# Altium PCB PCB1.PcbDoc
Units mm, origin at the board's own origin, x right, y up, seen from the top; angles counter-clockwise.
Board outline 152.4 x 101.6 mm, 2 copper layers (Top Layer, Bottom Layer); 144 components, 73 nets, 398 pads, 0 vias.
Unrouted connection lines stored in the file: 292.
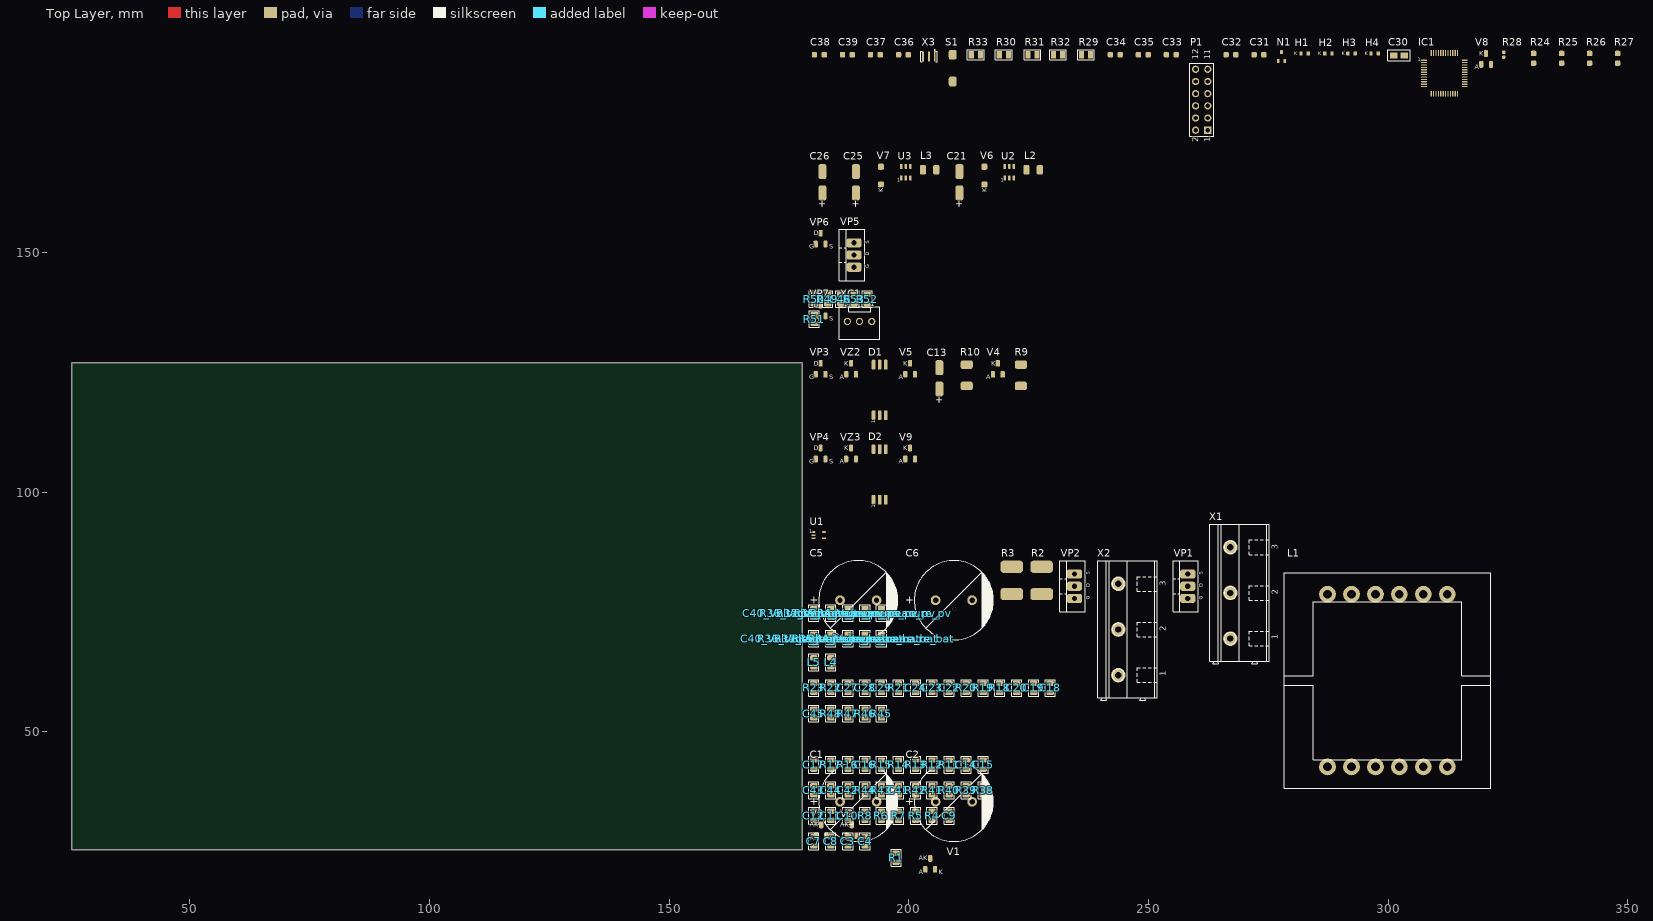
[diagram p0: Top Layer view]
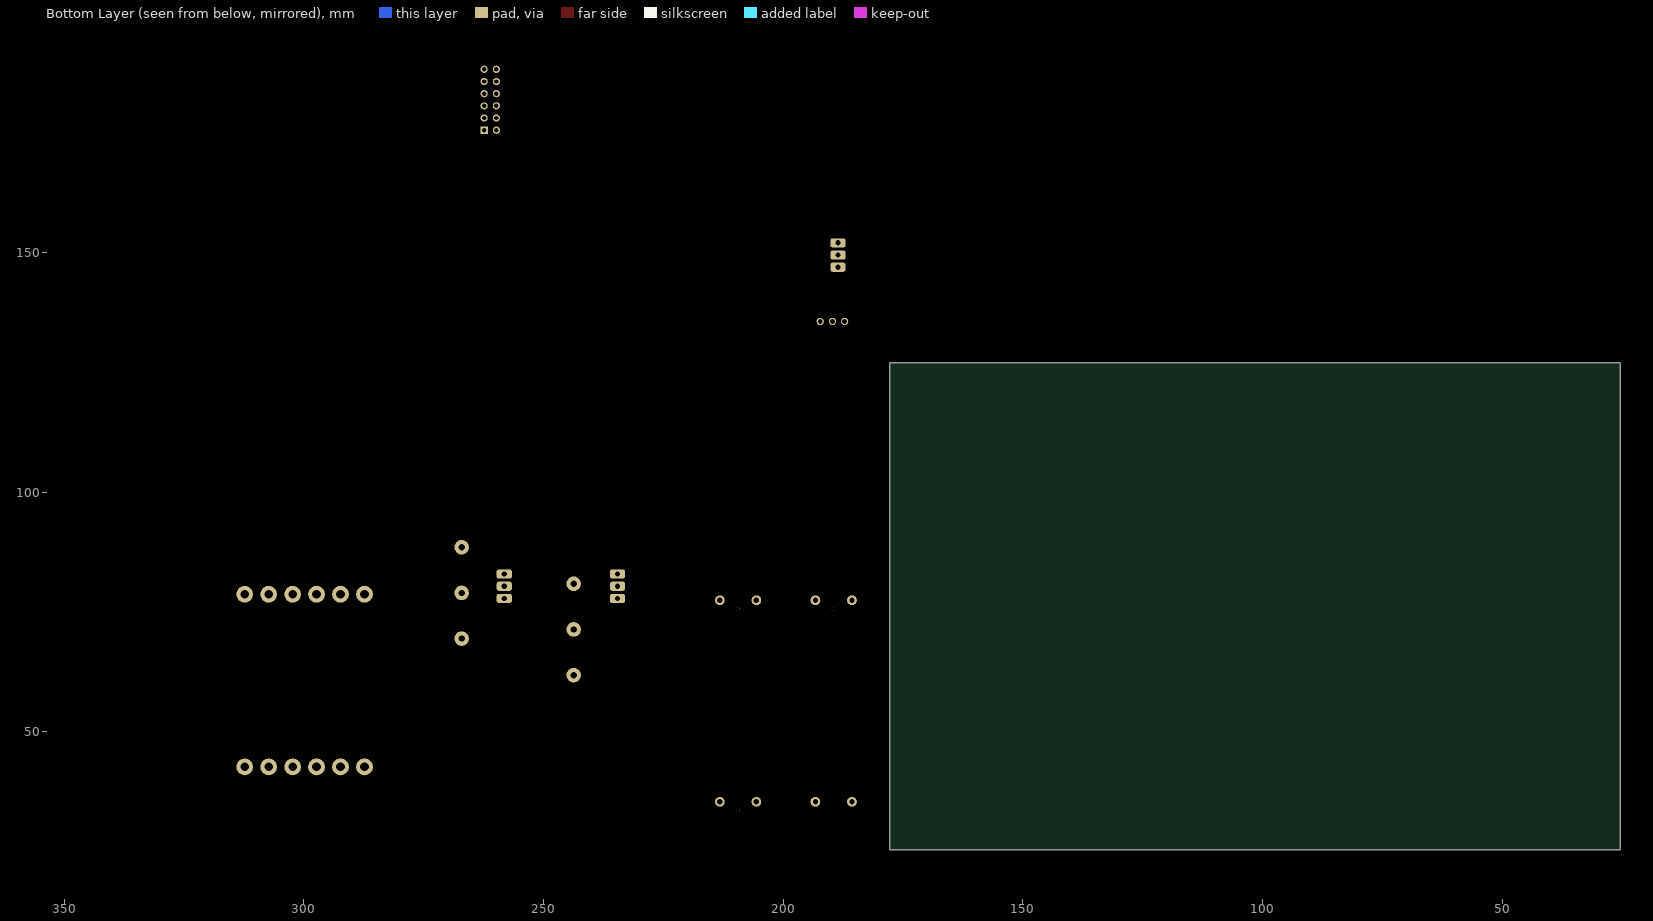
[diagram p1: Bottom Layer view, seen from below]

## Layer stack, top to bottom
Top Layer: signal copper 0.0356
Dielectric: dielectric 0.32, FR-4, Dk 4.8
Bottom Layer: signal copper 0.0356

## Board outline
25.4,25.4 177.8,25.4 177.8,127 25.4,127

## Design rules (kind name [scope] priority, off if disabled: settings)
Clearance [All] p1: gap=0.254
PolygonConnect [All] p1: connectstyle=Relief reliefconductorwidth=0.254 reliefentries=4 polygonreliefangle="90 Angle"
RoomDefinition FAN [InComponentClass('FAN')] p1: confinementstyle=ConfineIn formatcopy=TRUE lockcomponents=FALSE outline 178.943,131.699 194.183,131.699 194.183,142.621 178.943,142.621
RoutingVias [All] p1: holewidth=0.711 width=1.27 viastyle="Through Hole" minholewidth=0.711 minwidth=1.27 maxholewidth=0.711 maxwidth=1.27
SilkscreenOverComponentPads SilkToSolderMaskClearance [IsPad] p1: minsilkscreentomaskgap=0.254
SolderMaskExpansion [All] p1: expansion=0.102
Width [All] p1: maxlimit=0.254 minlimit=0.254 preferedwidth=0.254
27 further rules are at their usual default settings.

## Classes and differential pairs
channel class Voltage_measure: Voltage_measure_bat Voltage_measure_pv
component class Voltage_measure_pv: C40_Voltage_measure_pv R34_Voltage_measure_pv R35_Voltage_measure_pv R36_Voltage_measure_pv R37_Voltage_measure_pv
component class Voltage_measure_bat: C40_Voltage_measure_bat R34_Voltage_measure_bat R35_Voltage_measure_bat R36_Voltage_measure_bat R37_Voltage_measure_bat
component class uC: C30 C31 C32 C33 C34 C35 C36 C37 C38 C39 H1 H2 H3 H4 IC1 L4 L5 N1 P1 R24 R25 R26 R27 R28 R29 R30 R31 R32 R33 S1 V8 X3
component class Converter: C1 C2 C3 C4 C5 C6 C7 C8 L1 R1 R2 R3 VP1 VP2 X1 X2
component class Buck_converter: V1 V2 V3
component class Current_measure_bat: C9 C10 C11 C12 R4 R5 R6 R7 R8 U1
component class Driver_rect: C41 C42 C43 C44 D2 R38 R39 R40 R41 R42 R43 R44 V9 VP4 VZ3
component class Driver_SW: C13 C14 C15 C16 C17 D1 R9 R10 R11 R12 R13 R14 R15 R16 R17 V4 V5 VP3 VZ1 VZ2
component class FAN: C46 R49 R50 R51 R52 R53 V10 VP7 XC1
component class Output: C45 R45 R46 R47 R48 VP5 VP6
component class SMPS: C18 C19 C20 C21 C22 C23 C24 C25 C26 C27 C28 C29 L2 L3 R18 R19 R20 R21 R22 R23 U2 U3 V6 V7

## Components (designator, comment, footprint, x,y, rotation, side; value= is the part's Value field where it differs from the comment)
C1 "10190340" "CR 1.1 7.62 16.5" 185.674,35.433 r0 top
C2 "10190340" "CR 1.1 7.62 16.5" 205.613,35.433 r0 top
C3 "10192075" C0805_R_V0 187.325,27.178 r90 top
C4 "11736520" C0805_R_V0 190.881,27.178 r90 top
C5 "10190340" "CR 1.1 7.62 16.5" 185.674,77.47 r0 top
C6 "10190340" "CR 1.1 7.62 16.5" 205.613,77.47 r0 top
C7 "10192075" C0805_R_V0 180.213,27.178 r90 top
C8 "11736520" C0805_R_V0 183.769,27.178 r90 top
C9 "10192075" C0805_R_V0 208.407,32.512 r90 top
C10 "10192075" C0805_R_V0 187.325,32.512 r90 top
C11 "10192075" C0805_R_V0 183.769,32.512 r90 top
C12 "10192075" C0805_R_V0 180.213,32.512 r90 top
C13 "11690909" "CAP UUD CR 5X5.8" 206.375,121.539 r90 top
C14 "11736520" C0805_R_V0 211.963,43.18 r90 top
C15 "10192075" C0805_R_V0 215.519,43.18 r90 top
C16 "10192075" C0805_R_V0 190.881,43.18 r90 top
C17 "10192075" C0805_R_V0 180.213,43.18 r90 top
C18 "11736520" C0805_R_V0 229.489,59.182 r90 top
C19 "10192075" C0805_R_V0 226.06,59.182 r90 top
C20 "11736520" C0805_R_V0 222.504,59.182 r90 top
C21 "11690909" "CAP UUD CR 5X5.8" 210.566,162.433 r90 top
C22 "11736520" C0805_R_V0 208.407,59.182 r90 top
C23 "10192075" C0805_R_V0 204.851,59.182 r90 top
C24 "11736520" C0805_R_V0 201.422,59.182 r90 top
C25 "11690909" "CAP UUD CR 5X5.8" 188.976,162.433 r90 top
C26 "11690909" "CAP UUD CR 5X5.8" 181.991,162.433 r90 top
C27 "11736520" C0805_R_V0 187.325,59.182 r90 top
C28 "10192075" C0805_R_V0 190.881,59.182 r90 top
C29 "10192075" C0805_R_V0 194.31,59.182 r90 top
C30 "2u2F 6.8V 10%" 0805_R_V0 302.26,191.135 r0 top
C31 "11736520" C0805A 272.034,191.262 r0 top
C32 "2u2F 6.8V 10%" C0805A 266.192,191.262 r0 top
C33 "1uF 50V 10%" C0805A 253.746,191.262 r0 top
C34 "1uF 50V 10%" C0805A 242.062,191.262 r0 top
C35 "100nF 6.8V 10%" C0805A 247.904,191.262 r0 top
C36 "10nF 6.8V 10%" C0805A 197.866,191.262 r0 top
C37 "2u2F 6.8V 10%" C0805A 192.024,191.262 r0 top
C38 "36pF 50V" C0805A 180.34,191.262 r0 top
C39 "36pF 50V" C0805A 186.182,191.262 r0 top
C40_Voltage_measure_bat "10192075" C0805_R_V0 180.213,69.469 r90 top (schematic designator C40)
C40_Voltage_measure_pv "10192075" C0805_R_V0 180.213,74.803 r90 top (schematic designator C40)
C41 "10192075" C0805_R_V0 197.866,37.846 r90 top
C42 "10192075" C0805_R_V0 187.325,37.846 r90 top
C43 "11736520" C0805_R_V0 180.213,37.846 r90 top
C44 "10192075" C0805_R_V0 183.769,37.846 r90 top
C45 "10192075" C0805_R_V0 180.213,53.848 r90 top
C46 "10192075" C0805_R_V0 185.838,140.288 r90 top
D1 "12544475" "SO-6 (11.5 MM)" 192.659,116.078 r90 top
D2 "12544475" "SO-6 (11.5 MM)" 192.659,98.425 r90 top
H1 "12133537" "LED 0603_12133537(Primary)" 281.813,191.516 r0 top
H2 "12133535" "LED 0603_12133535(Primary)" 286.766,191.516 r0 top
H3 "12133535" "LED 0603_12133535(Primary)" 291.592,191.516 r0 top
H4 "12133535" "LED 0603_12133535(Primary)" 296.418,191.516 r0 top
IC1 "TMS320F28027_PT" LQFP48 307.467,190.119 r0 top
L1 "INDUTOR 100uH EE42" "INDUTOR EE42_V1" 299.847,60.706 r90 top
L2 "12924787" L1210 224.536,167.259 r0 top
L3 "12924787" L1210 202.946,167.259 r0 top
L4 "Inductor" R0805_R_V0 183.769,64.516 r90 top
L5 "Inductor" R0805_R_V0 180.213,64.516 r90 top
N1 "10050567" SC70A 277.749,190.881 r0 top
P1 "Header 6X2" HDR2X6 262.382,175.514 r90 top
R1 "10118077" R0805_R_V0 197.358,23.749 r90 top
R2 "11372881" WSL2816A 227.711,78.74 r90 top
R3 "11372881" WSL2816A 221.488,78.74 r90 top
R4 "10118077" R0805_R_V0 204.851,32.512 r90 top
R5 "10118077" R0805_R_V0 201.422,32.512 r90 top
R6 "10118077" R0805_R_V0 194.31,32.512 r90 top
R7 "10118077" R0805_R_V0 197.866,32.512 r90 top
R8 "10118077" R0805_R_V0 190.881,32.512 r90 top
R9 "10191999" R2010A 223.393,122.174 r90 top
R10 "10191999" R2010A 212.09,122.174 r90 top
R11 "10118077" R0805_R_V0 208.407,43.18 r90 top
R12 "10118077" R0805_R_V0 204.851,43.18 r90 top
R13 "10118077" R0805_R_V0 201.422,43.18 r90 top
R14 "10118077" R0805_R_V0 197.866,43.18 r90 top
R15 "10118077" R0805_R_V0 194.31,43.18 r90 top
R16 "10118077" R0805_R_V0 187.325,43.18 r90 top
R17 "10118077" R0805_R_V0 183.769,43.18 r90 top
R18 "10191981" R0805_R_V0 218.948,59.182 r90 top
R19 "10191981" R0805_R_V0 215.519,59.182 r90 top
R20 "10191981" R0805_R_V0 211.963,59.182 r90 top
R21 "10191981" R0805_R_V0 197.866,59.182 r90 top
R22 "10191981" R0805_R_V0 183.769,59.182 r90 top
R23 "10191981" R0805_R_V0 180.213,59.182 r90 top
R24 "10191962" R0805A 330.327,189.484 r90 top
R25 "10191962" R0805A 336.169,189.484 r90 top
R26 "10191962" R0805A 342.011,189.484 r90 top
R27 "10191962" R0805A 347.853,189.484 r90 top
R28 "11417855" R0402 324.104,191.262 r90 top
R29 "1k 5% 0805" 0805_SH_R_V1 236.982,191.262 r0 top
R30 "1k 5% 0805" 0805_SH_R_V1 219.837,191.262 r0 top
R31 "1k 5% 0805" 0805_SH_R_V1 225.806,191.262 r0 top
R32 "1k 5% 0805" 0805_SH_R_V1 231.14,191.262 r0 top
R33 "1M 1% 0805" 0805_SH_R_V1 213.995,191.262 r0 top
R34_Voltage_measure_bat "10118077" R0805_R_V0 194.31,69.469 r90 top (schematic designator R34)
R34_Voltage_measure_pv "10118077" R0805_R_V0 194.31,74.803 r90 top (schematic designator R34)
R35_Voltage_measure_bat "10118077" R0805_R_V0 190.881,69.469 r90 top (schematic designator R35)
R35_Voltage_measure_pv "10118077" R0805_R_V0 190.881,74.803 r90 top (schematic designator R35)
R36_Voltage_measure_bat "10118077" R0805_R_V0 183.769,69.469 r90 top (schematic designator R36)
R36_Voltage_measure_pv "10118077" R0805_R_V0 183.769,74.803 r90 top (schematic designator R36)
R37_Voltage_measure_bat "10118077" R0805_R_V0 187.325,69.469 r90 top (schematic designator R37)
R37_Voltage_measure_pv "10118077" R0805_R_V0 187.325,74.803 r90 top (schematic designator R37)
R38 "10118077" R0805_R_V0 215.519,37.846 r90 top
R39 "10118077" R0805_R_V0 211.963,37.846 r90 top
R40 "10118077" R0805_R_V0 208.407,37.846 r90 top
R41 "10118077" R0805_R_V0 204.851,37.846 r90 top
R42 "10118077" R0805_R_V0 201.422,37.846 r90 top
R43 "10118077" R0805_R_V0 194.31,37.846 r90 top
R44 "10118077" R0805_R_V0 190.881,37.846 r90 top
R45 "10118077" R0805_R_V0 194.31,53.848 r90 top
R46 "10118077" R0805_R_V0 190.881,53.848 r90 top
R47 "10118077" R0805_R_V0 187.325,53.848 r90 top
R48 "10118077" R0805_R_V0 183.769,53.848 r90 top
R49 "10118077" R0805_R_V0 183.08,140.288 r90 top
R50 "10118077" R0805_R_V0 180.322,140.288 r90 top
R51 "10118077" R0805_R_V0 180.322,136.13 r90 top
R52 "10118077" R0805_R_V0 191.354,140.288 r90 top
R53 "10118077" R0805_R_V0 188.596,140.288 r90 top
S1 "10050610" "TECLA STSM BOURNS" 209.169,188.468 r90 top
U1 "OPA348AIDCKR" "DCK R-PDSO-G5" 181.229,91.059 r0 top
U2 "12576507" SOT23-6 220.98,166.751 r0 top
U3 "12576507" SOT23-6 199.39,166.751 r0 top
V1 "DIODO BAS40" SOT23-BAV99A 204.47,22.479 r0 top
V2 "DIODO BAS40" SOT23-BAV99A 188.087,29.464 r0 top
V3 "DIODO BAS40" SOT23-BAV99A 181.737,29.464 r0 top
V4 "10261302" SOT23A 218.567,125.73 r0 top
V5 "10261302" SOT23A 200.279,125.73 r0 top
V6 "10192125" SOD123A 215.773,164.211 r90 top
V7 "10192125" SOD123A 194.183,164.211 r90 top
V8 "10192124" SOT23A 320.421,190.373 r0 top
V9 "10261302" SOT23A 200.279,108.077 r0 top
VP1 "10190449" "TO-220AB (Primary)" 258.191,77.851 r90 top
VP2 "10190449" "TO-220AB (Primary)" 234.569,77.851 r90 top
VP3 "11110327" MOS_SOT23A 181.61,125.73 r0 top
VP4 "11110327" MOS_SOT23A 181.61,108.077 r0 top
VP5 "10190449" "TO-220AB (Primary)" 188.595,146.939 r90 top
VP6 "11110327" MOS_SOT23A 181.61,152.908 r0 top
VP7 "11110327" MOS_SOT23A 181.61,137.922 r0 top
VZ2 "10050447" ZEN_SOT23A 187.96,125.73 r0 top
VZ3 "10050447" ZEN_SOT23A 187.96,108.077 r0 top
X1 "10233722" 662-A-111/03-SM 267.081,69.469 r90 top
X2 "10233722" 662-A-111/03-SM 243.713,61.849 r90 top
X3 "XTAL 60MHz" "XTAL  CSTCE_G_A" 204.216,190.881 r0 top
XC1 "10190697" "MOLEX 3P 180G M" 192.278,135.636 r0 top

## Footprints (in the part's own frame and the unit in brackets; to place one, negate y for a bottom-side part, rotate by r counter-clockwise, add the part's x,y. Pads: shape width x height; smd on the part's side, far side on the other; paste and mask are expansions set on the pad)
662-A-111/03-SM [mil]
  round 120 hole 51.18: 1(0,0) 2(375,0) 3(750,0)
  silkscreen extent -208,-320 938,170, body extent -218,-311 939,181, height 847
0805_R_V0 [mm]
  rect 1.524x1.27 smd: 1(-1.1,0) 2(1.1,0)
  silkscreen extent -2.36,-1.13 2.37,1.13
0805_SH_R_V1 [mm] "IPC"
  rect 1.1x1.55 smd: 1(0.95,0) 2(-0.95,0)
  silkscreen extent -1.75,-1.05 1.75,1.05, body extent -1.02,-0.63 0.98,0.62, height 0.78
C0805_R_V0 [mm] "IPC"
  rrect50% 1.1x1.55 smd: 1(0.95,0) 2(-0.95,0)
  silkscreen extent -1.75,-1.05 1.75,1.05, body extent -1,-0.62 1,0.63, height 0.78
C0805A [mil]
  rrect50% 45x45 smd: 1(0,0) 2(80,0)
  body extent 1,-25 79,25, height 31
"CAP UUD CR 5X5.8" [mm]
  rrect50% 3.1x1.651 smd: 1(0,0) 2(4.445,0)
  body extent -0.46,-2.65 5.04,2.65, height 6
"CR 1.1 7.62 16.5" [mil]
  round 27.6 hole 30 unplated: 0(152,-72)
  round 80 hole 43.31: 1(0,0) 2(300,0)
  silkscreen extent -175,-325 475,325, body extent -174,-324 475,324, height 1030
"DCK R-PDSO-G5" [mm] "SOT23, 5-Leads, Body 2x1.25mm, Pitch 0.65mm"
  rrect50% 0.762x0.338 smd: 1(-1.1,0.65) 2(-1.1,0) 3(-1.1,-0.65) 4(1.1,-0.65) 5(1.1,0.65)
  body extent -1.15,-1.05 1.15,1.05, height 1
HDR2X6 [mm] "Connector; Header; 6x2 Position"
  rect 1.5x1.5 hole 0.9: 1(0,0)
  round 1.5 hole 0.9: 2(0,2.54) 3(2.54,0) 4(2.54,2.54) 5(5.08,0) 6(5.08,2.54) 7(7.62,0) 8(7.62,2.54) 9(10.16,0) 10(10.16,2.54) 11(12.7,0) 12(12.7,2.54)
  silkscreen extent -1.27,-1.27 13.97,3.81
"INDUTOR EE42_V1" [mm]
  round 3.5 hole 1.8: 1(-18,-12.5) 1(-18,-7.5) 1(-18,-2.5) 1(-18,2.5) 1(-18,7.5) 1(-18,12.5) 2(18,-12.5) 2(18,-7.5) 2(18,-2.5) 2(18,2.5) 2(18,7.5) 2(18,12.5)
  silkscreen extent -22.5,-21.5 22.5,21.5, body extent -22.5,-21.5 22.5,21.5, height 35
L1210 [mil] "Indutor SMD"
  rrect50% 50x80 smd: 1(0,0) 2(110,0)
  body extent -8,-50 118,48, height 98
"LED 0603_12133535(Primary)" [mil]
  rrect50% 28x35 smd: A(60,0) K(0,0)
  body extent -3,-18 63,18, height 35
"LED 0603_12133537(Primary)" [mil]
  rrect50% 28x35 smd: A(60,0) K(0,0)
  body extent -2,-18 64,18, height 35
LQFP48 [mil]
  rrect50% 48x10 smd: 1(0.15,-0.2) 2(0.15,-19.89) 3(0.15,-39.57) 4(0.15,-59.26) 5(0.15,-78.94) 6(0.15,-98.63) 7(0.15,-118.31) 8(0.15,-138) 9(0.15,-157.69) 10(0.15,-177.37) 11(0.15,-197.06) 12(0.15,-216.74) 25(335.3,-216.74) 26(335.3,-197.06) 27(335.3,-177.37) 28(335.3,-157.69) 29(335.3,-138) 30(335.3,-118.31) 31(335.3,-98.63) 32(335.3,-78.94) 33(335.3,-59.26) 34(335.3,-39.57) 35(335.3,-19.89) 36(335.3,-0.2)
  rrect50% 10x48 smd: 13(59.2,-275.8) 14(78.89,-275.8) 15(98.57,-275.8) 16(118.26,-275.8) 17(137.94,-275.8) 18(157.63,-275.8) 19(177.32,-275.8) 20(197,-275.8) 21(216.68,-275.8) 22(236.37,-275.8) 23(256.06,-275.8) 24(275.74,-275.8) 37(275.74,58.85) 38(256.06,58.85) 39(236.37,58.85) 40(216.68,58.85) 41(197,58.85) 42(177.32,58.85) 43(157.63,58.85) 44(137.94,58.85) 45(118.26,58.85) 46(98.57,58.85) 47(78.89,58.85) 48(59.2,58.85)
  body extent -10,-286 345,69, height 63
"MOLEX 3P 180G M" [mil]
  round 59.5 hole 39.37: 1(0,0) 2(-100,0) 3(-200,0)
  silkscreen extent -265,-145 65,120, body extent -263,-118 63,118, height 453
MOS_SOT23A [mil]
  rrect50% 35x55 smd: D(0,45) G(-40,-45) S(40,-45)
  body extent -57,-55 57,55, height 51
R0402 [mil]
  rrect50% 27x25 smd: 1(-20,0) 2(20,0)
  body extent -20,-10 20,10, height 20
R0805_R_V0 [mm] "IPC"
  rrect50% 1.1x1.55 smd: 1(0.95,0) 2(-0.95,0)
  silkscreen extent -1.75,-1.05 1.75,1.05, body extent -1.02,-0.63 0.98,0.62, height 0.78
R0805A [mil]
  rrect50% 45x45 smd: 1(0,0) 2(80,0)
  body extent 1,-25 79,25, height 31
R2010A [mil]
  rrect50% 70x100 smd: 1(0,0) 2(175,0)
  body extent -11,-50 186,50, height 22
SC70A [mil]
  rrect50% 20.98x34 smd: GND(-26,-36) VCC(0,36) ~RESET(26,-36)
  body extent -44,-44 44,44, height 44
"SO-6 (11.5 MM)" [mil]
  rrect50% 80x30 smd: 1(0,0) 2(0,-50) 3(0,-100) 4(415,-100) 5(415,-50) 6(415,0)
  body extent -19,-140 433,40, height 130
SOD123A [mil]
  rrect50% 50x50 smd: A(145,0) K(0,0)
  body extent -3,-34 149,33, height 57
SOT23-6 [mil]
  rrect50% 20x40 smd: 1(-37.5,-47.5) 2(0,-47.5) 3(37.5,-47.5) 4(37.5,47.5) 5(0,47.5) 6(-37.5,47.5)
  body extent -57,-55 57,55, height 57
SOT23-BAV99A [mil]
  rrect50% 35x55 smd: A(-40,-45) AK(0,45) K(40,-45)
  body extent -57,-55 57,55, height 51
SOT23A [mil]
  rrect50% 35x55 smd: A(-40,-45) K(0,45) NC(40,-45)
  body extent -57,-55 57,55, height 51
"TECLA STSM BOURNS" [mil]
  rrect50% 80x65 smd: 1(-110,0) 2(110,0)
  body extent -140,-69 144,69, height 169
"TO-220AB (Primary)" [mm]
  rrect50% 1.905x3.175 hole 1.1: D(2.54,0) G(0,0) S(5.08,0)
  silkscreen extent -2.79,-2.21 7.87,3.05, body extent -2.8,-2.18 7.88,2.65, height 19.89
WSL2816A [mm]
  rrect50% 2.54x4.7 smd: 1(0,0) 2(5.715,0)
  body extent -0.82,-2.22 6.53,2.23, height 0.91
"XTAL  CSTCE_G_A" [mm]
  rect 0.4x2.1 smd: 0(0,0) 1(1.2,0) 2(-1.2,0)
  silkscreen extent -1.7,-1.1 1.7,1.4, body extent -1.6,-0.6 1.6,0.7, height 0.7
ZEN_SOT23A [mil]
  rrect50% 35x55 smd: A(-40,-45) K(0,45) NC(40,-45)
  body extent -57,-55 57,55, height 51

## Part data
C1 C2 C5 C6: "CAP ELE 1000uF 50V"
C3 C7 C9 C10 C11 C12 C15 C16 C17 C19 C23 C28 C29 C40_Voltage_measure_bat C40_Voltage_measure_pv C41 C42 C44 C45 C46: "CER SMD 100nF 50V"
C4 C8 C14 C18 C20 C22 C24 C27 C31 C43: "CER SMD X7R 1uF 50V 10%"
C13 C21 C25 C26: "CAP. ELET. SMD 22uF 35V"
C30 C32 C33 C34 C35 C36 C37: library part 11736520, "CER SMD X7R 1uF 50V 10%"
C38 C39: library part 11736520, "CER SMD C0G 36pF 50V"
D1 D2: "CI SMD ACPL-W343"
H1: "LED SMD VM (0603)"
H2 H3 H4: "LED SMD VD (0603)"
IC1: "LQFP48"
L1: library part 12578205, "INDUTOR 560uH 4A PCV-2"
L2 L3: "INDUTOR SMD 47uH 390mA"
N1: "CI SMD ADM803TAKSZ"
P1: "Header, 6-Pin, Dual row"
R1 R4 R5 R6 R7 R8 R11 R12 R13 R14 R15 R16 R17 R34_Voltage_measure_bat R34_Voltage_measure_pv R35_Voltage_measure_bat R35_Voltage_measure_pv R36_Voltage_measure_bat R36_Voltage_measure_pv R37_Voltage_measure_bat R37_Voltage_measure_pv R38 R39 R40 R41 R42 R43 R44 R45 R46 R47 R48 R49 R50 R51 R52 R53: "RFM SMD 1K 1% 0.1W"
R2 R3: "RFM SMD 0R015 1% 2W"
R9 R10: "RFM SMD 1K 1% 0.5W"
R18 R19 R20 R21 R22 R23: "RFM SMD 150R 1% 0.1W"
R24 R25 R26 R27: "RFM SMD 330R 5% 0.1W"
R28: "RES SMD 4K7 5% 0,063W"
R29 R30 R31 R32 R33: library part Res3_2, "Resistor"
S1: "Tecla SMD STSM-31-STR"
U1: "1 MHz, 45 uA, RRIO, Single Operational Amplifier, 2.1 to 5.5 V, -40 to 125 degC, 5-pin SOT23 (DCK5), Green (RoHS & no Sb/Br)"
U2 U3: "CI SMD LM2842"
V1 V2 V3 V8: "DIODO SMD BAS40"
V4 V5 V9: "DIODO SMD BAS16"
V6 V7: "Diodo SMD MBR0540 (SCHOTTKY)"
VP1 VP2 VP5: "MOSFET IRFB31N20D"
VP3 VP4 VP6 VP7: "MOSFET SMD BSH111"
VZ2 VZ3: "Zener  SMD BZX84C18"
X1 X2: "CON. EK950V-03P"
X3: library part XTAL, "Crystal Oscillator"
XC1: "CON MOLEX 3P 180G"

## Nets (pads, with @x,y where several pads share a name; then routed paths per layer and width w, separated by ;. In a path a pad name is that pad's centre, name@x,y a point inside that pad or via, vN(x,y) a via of type N, cw(c..) or ccw(c..) an arc to the next point about the centre after c; other vN are vias at no path point)
3V3: C12.2 C23.2 C24.2 C25.1 C34.1 C35.1 L3.2 L4.1 L5.2 N1.VCC P1.12 R12.1 R22.2 R23.2 R24.2 R25.2 R26.2 R27.2 R28.2 R29.2 R30.2 R31.2 R39.1 R49.2 U1.5 V1.K V2.K V3.K V8.K
15V: C19.2 C20.2 C21.1 C43.2 C44.2 D2.6 L2.2 R19.2 R20.2 XC1.1
\R\E\S\E\T\: C31.1 C36.1 IC1.3 N1.~RESET R28.1 R29.1 S1.2 V8.A
BAT+: C1.1 C2.1 C3.1 C4.1 C26.1 C27.2 C28.2 C29.2 L1.2 R1.1 R34_Voltage_measure_bat.2 U2.4 U2.5 U3.4 U3.5 X1.3
FAN_PWR: IC1.38 R52.1
FAN_SPEED: R51.2
GATE_RECT: C41.2 R40.2 R42.2 V9.A VP2.G VZ3.K
GATE_SW: C16.2 R13.2 R15.2 V5.A VP1.G VZ2.K
GND: C1.2 C2.2 C3.2 C4.2 C10.1 C11.1 C12.1 C17.1 C19.1 C20.1 C21.2 C23.1 C24.1 C25.2 C26.2 C27.1 C28.1 C29.1 C30.2 C31.2 C32.2 C33.2 C34.2 C35.2 C36.2 C37.1 C38.1 C39.2 C40_Voltage_measure_bat.1 C40_Voltage_measure_pv.1 C41.1 C42.1 C43.1 C44.1 C45.1 C46.1 D2.4 IC1.12 IC1.33 IC1.34 IC1.44 N1.GND P1.2 P1.10 R1.2 R2.2 R3.2 R17.1 R18.2 R21.2 R32.2 R36_Voltage_measure_bat.1 R36_Voltage_measure_pv.1 R37_Voltage_measure_bat.1 R37_Voltage_measure_pv.1 R42.1 R44.1 R45.2 R48.1 R53.1 S1.1 U1.1 U1.2 U2.2 U3.2 V1.A V2.A V3.A V6.A V7.A VP3.S VP4.S VP5.S VP6.S VP7.S VZ3.A X2.1 X2.3
GPIO34: IC1.19 P1.1 R30.1
HOT_SPOT: C13.2 C14.2 C15.1 C16.1 D1.4 L1.1 R15.1 VP1.S VP2.D VZ2.A
IO: C10.2 IC1.9 R8.2 V3.AK
LED_BAT: H3.K IC1.26
LED_FAULT: H1.K IC1.29
LED_OUT: H4.K IC1.25
LED_PV: H2.K IC1.27
NetC9_1: C9.1 R4.1 R5.1 R7.2 U1.3
NetC9_2: C9.2 R4.2 R5.2 R8.1 U1.4
NetC11_2: C11.2 R6.2 R7.1
NetC17_2: C17.2 R16.2 R17.2 VP3.G
NetC18_1: C18.1 U2.1
NetC18_2: C18.2 L2.1 U2.6 V6.K
NetC22_1: C22.1 U3.1
NetC22_2: C22.2 L3.1 U3.6 V7.K
NetC38_2: C38.2 IC1.45 R33.1 X3.1
NetC39_1: C39.1 IC1.46 R33.2 X3.2
NetC42_2: C42.2 R43.2 R44.2 VP4.G
NetC45_2: C45.2 R47.2 R48.2 VP6.G
NetC46_2: C46.2 R52.2 R53.2 VP7.G
NetD1_1: D1.1 R12.2
NetD1_3: D1.3 R14.2
NetD1_5: D1.5 R11.1 R13.1
NetD2_1: D2.1 R39.2
NetD2_3: D2.3 R41.2
NetD2_5: D2.5 R38.1 R40.1
NetH1_A: H1.A R24.1
NetH2_A: H2.A R25.1
NetH3_A: H3.A R26.1
NetH4_A: H4.A R27.1
NetR9_2: R9.2 R10.2 V4.A
NetR11_2: R11.2 V5.K
NetR14_1: R14.1 VP3.D
NetR18_1: R18.1 R19.1 R20.1 U2.3
NetR21_1: R21.1 R22.1 R23.1 U3.3
NetR34_Voltage_measure_bat_1: R34_Voltage_measure_bat.1 R35_Voltage_measure_bat.2 R36_Voltage_measure_bat.2 R37_Voltage_measure_bat.2
NetR34_Voltage_measure_pv_1: R34_Voltage_measure_pv.1 R35_Voltage_measure_pv.2 R36_Voltage_measure_pv.2 R37_Voltage_measure_pv.2
NetR38_2: R38.2 V9.K
NetR41_1: R41.1 VP4.D
NetR45_1: R45.1 R46.2 VP5.G
NetR46_1: R46.1 VP6.D
NetR49_1: R49.1 R51.1 XC1.3
NetR50_1: R50.1 VP7.D
NetR50_2: R50.2 XC1.2
OUTPUT: VP5.D X2.2
PV_+: C5.1 C6.1 C7.1 C8.1 R9.1 R10.1 R34_Voltage_measure_pv.2 VP1.D X1.1
PV_-: C5.2 C6.2 C7.2 C8.2 R2.1 R3.1 R6.1 VP2.S X1.2
PWM1B: IC1.28 R16.1
PWM2A: IC1.37 R43.1
PWM3A: IC1.39 R47.1
SCI_RX: IC1.48 P1.4
SCI_TX: IC1.1 P1.6
TCK: P1.3
TDI: IC1.20 P1.5
TDO: IC1.22 P1.9 R31.1
TMS: IC1.21 P1.7
TRST: IC1.2 P1.11 R32.1
VBAT: C40_Voltage_measure_pv.2 IC1.5 R35_Voltage_measure_pv.1 V1.AK
VCC_SW: C13.1 C14.1 C15.2 D1.6 V4.K
VDD: C33.1 IC1.35 L4.2
VDD1: C32.1 IC1.32
VDD2: C37.2 IC1.43
VDDA: C30.1 IC1.11 L5.1
VIN_PV: C40_Voltage_measure_bat.2 IC1.7 R35_Voltage_measure_bat.1 V2.AK
pads on no net: C1.0 C2.0 C5.0 C6.0 D1.2 D2.2 IC1.4 IC1.6 IC1.8 IC1.10 IC1.13 IC1.14 IC1.15 IC1.16 IC1.17 IC1.18 IC1.23 IC1.24 IC1.30 IC1.31 IC1.36 IC1.40 IC1.41 IC1.42 IC1.47 P1.8 V4.NC V5.NC V8.NC V9.NC VZ2.NC VZ3.NC X3.0

## Text inside footprints (layer, text, board x,y; h text height)
C1: Top Overlay "+" at 179.375,34.722 h1.59
C2: Top Overlay "+" at 199.314,34.722 h1.59
C5: Top Overlay "+" at 179.375,76.759 h1.59
C6: Top Overlay "+" at 199.314,76.759 h1.59
C13: Top Overlay "+" at 207.01,118.3 h1.52 r90
C21: Top Overlay "+" at 211.201,159.195 h1.52 r90
C25: Top Overlay "+" at 189.611,159.195 h1.52 r90
C26: Top Overlay "+" at 182.626,159.195 h1.52 r90
D1: Top Overlay "1" at 192.964,114.427 h0.79 r90
D2: Top Overlay "1" at 192.964,96.774 h0.79 r90
H1: Top Overlay "K" at 280.441,191.11 h0.79
H2: Top Overlay "K" at 285.445,191.11 h0.79
H3: Top Overlay "K" at 290.271,191.11 h0.79
H4: Top Overlay "K" at 295.097,191.11 h0.79
IC1: Top Overlay "1" at 306.133,189.865 h0.79
P1: Top Overlay "12" at 260.35,190.246 h1.27 r90; Top Overlay "1" at 262.89,191.262 h1.27 r90; Top Overlay "1" at 262.89,190.246 h1.27 r90; Top Overlay "1" at 262.89,172.974 h1.27 r90; Top Overlay "2" at 260.35,172.974 h1.27 r90
U1: Top Overlay "1" at 179.235,91.453 h0.76
U2: Top Overlay "1" at 219.202,164.782 h0.79
U3: Top Overlay "1" at 197.612,164.782 h0.79
V1: Top Overlay "K" at 206.248,20.345 h0.95; Top Overlay "AK" at 202.057,23.19 h0.95; Top Overlay "A" at 202.12,20.32 h0.95
V2: Top Overlay "K" at 189.865,27.33 h0.95; Top Overlay "AK" at 185.674,30.175 h0.95; Top Overlay "A" at 185.737,27.305 h0.95
V3: Top Overlay "K" at 183.515,27.33 h0.95; Top Overlay "AK" at 179.324,30.175 h0.95; Top Overlay "A" at 179.387,27.305 h0.95
V4: Top Overlay "K" at 217.17,126.428 h0.95; Top Overlay "A" at 216.218,123.571 h0.95
V5: Top Overlay "K" at 198.882,126.428 h0.95; Top Overlay "A" at 197.929,123.571 h0.95
V6: Top Overlay "K" at 216.281,162.611 h0.95 r90
V7: Top Overlay "K" at 194.691,162.611 h0.95 r90
V8: Top Overlay "K" at 319.024,191.071 h0.95; Top Overlay "A" at 318.072,188.214 h0.95
V9: Top Overlay "K" at 198.882,108.775 h0.95; Top Overlay "A" at 197.929,105.918 h0.95
VP1: Top Overlay "G" at 261.366,77.622 h0.76 r90; Top Overlay "S" at 261.366,82.753 h0.76 r90; Top Overlay "D" at 261.366,80.213 h0.76 r90
VP2: Top Overlay "G" at 237.744,77.622 h0.76 r90; Top Overlay "S" at 237.744,82.753 h0.76 r90; Top Overlay "D" at 237.744,80.213 h0.76 r90
VP3: Top Overlay "S" at 183.426,123.596 h0.95; Top Overlay "G" at 179.26,123.571 h0.95; Top Overlay "D" at 180.213,126.428 h0.95
VP4: Top Overlay "S" at 183.426,105.943 h0.95; Top Overlay "G" at 179.26,105.918 h0.95; Top Overlay "D" at 180.213,108.775 h0.95
VP5: Top Overlay "G" at 191.77,146.71 h0.76 r90; Top Overlay "S" at 191.77,151.841 h0.76 r90; Top Overlay "D" at 191.77,149.301 h0.76 r90
VP6: Top Overlay "S" at 183.426,150.774 h0.95; Top Overlay "G" at 179.26,150.749 h0.95; Top Overlay "D" at 180.213,153.606 h0.95
VP7: Top Overlay "S" at 183.426,135.788 h0.95; Top Overlay "G" at 179.26,135.763 h0.95; Top Overlay "D" at 180.213,138.62 h0.95
VZ2: Top Overlay "A" at 185.611,123.571 h0.95; Top Overlay "K" at 186.563,126.428 h0.95
VZ3: Top Overlay "A" at 185.611,105.918 h0.95; Top Overlay "K" at 186.563,108.775 h0.95
X1: Top Overlay "1" at 276.987,69.215 h1.27 r90; Top Overlay "3" at 276.987,88.011 h1.27 r90; Top Overlay "2" at 276.987,78.613 h1.27 r90
X2: Top Overlay "1" at 253.619,61.595 h1.27 r90; Top Overlay "3" at 253.619,80.391 h1.27 r90; Top Overlay "2" at 253.619,70.993 h1.27 r90
XC1: Top Overlay "3" at 186.538,138.836 h0.95; Top Overlay "1" at 192.1,138.836 h0.95